# Altium PCB PCB.PcbDoc
Units mil, origin at the board's own origin, x right, y up, seen from the top; angles counter-clockwise.
Board outline 7235 x 2980 mil, 2 copper layers (Top Layer, Bottom Layer); 72 components, 85 nets, 462 pads, 111 vias.
Unrouted connection lines stored in the file: 162.
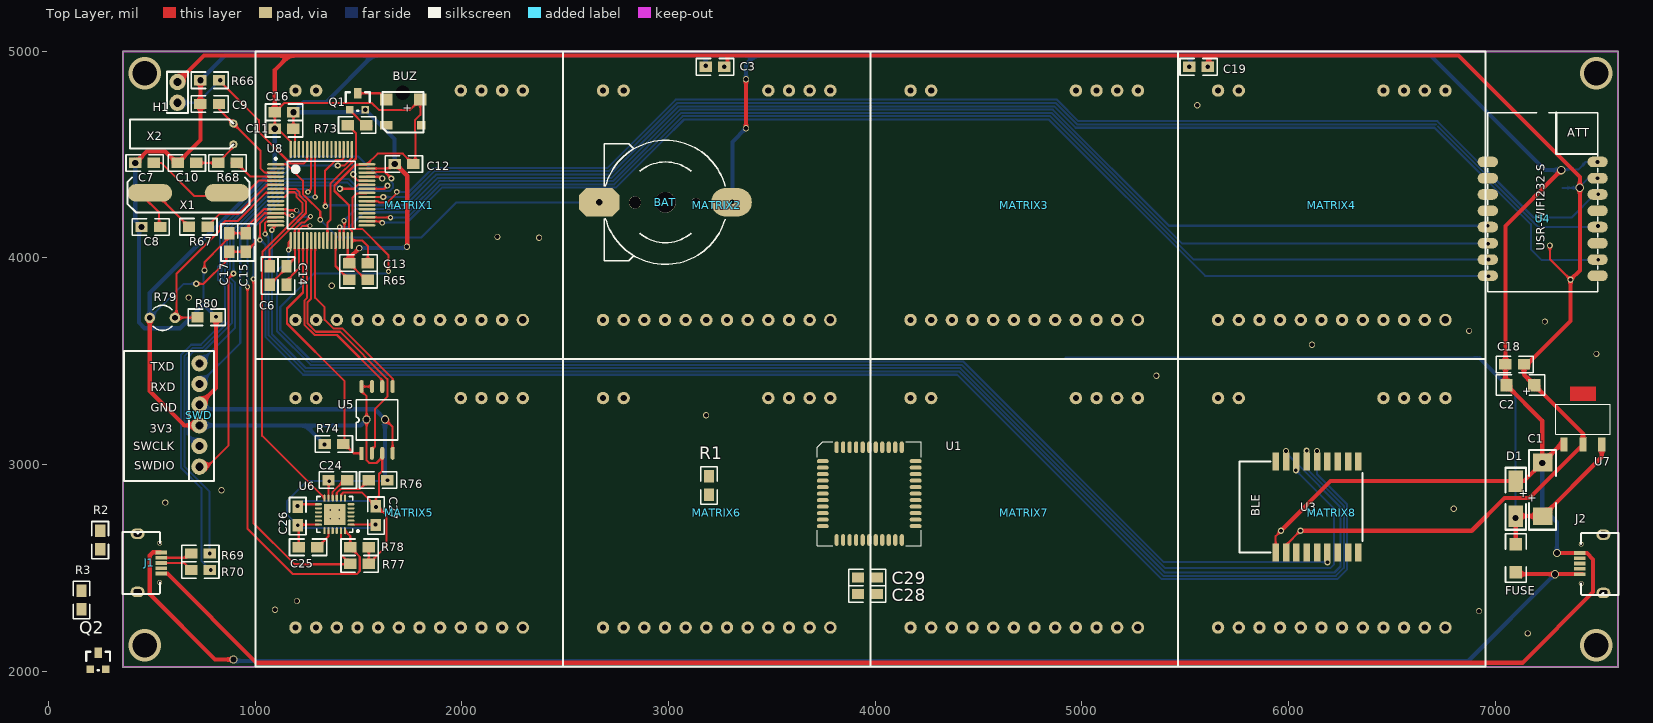
[diagram p0: Top Layer view]
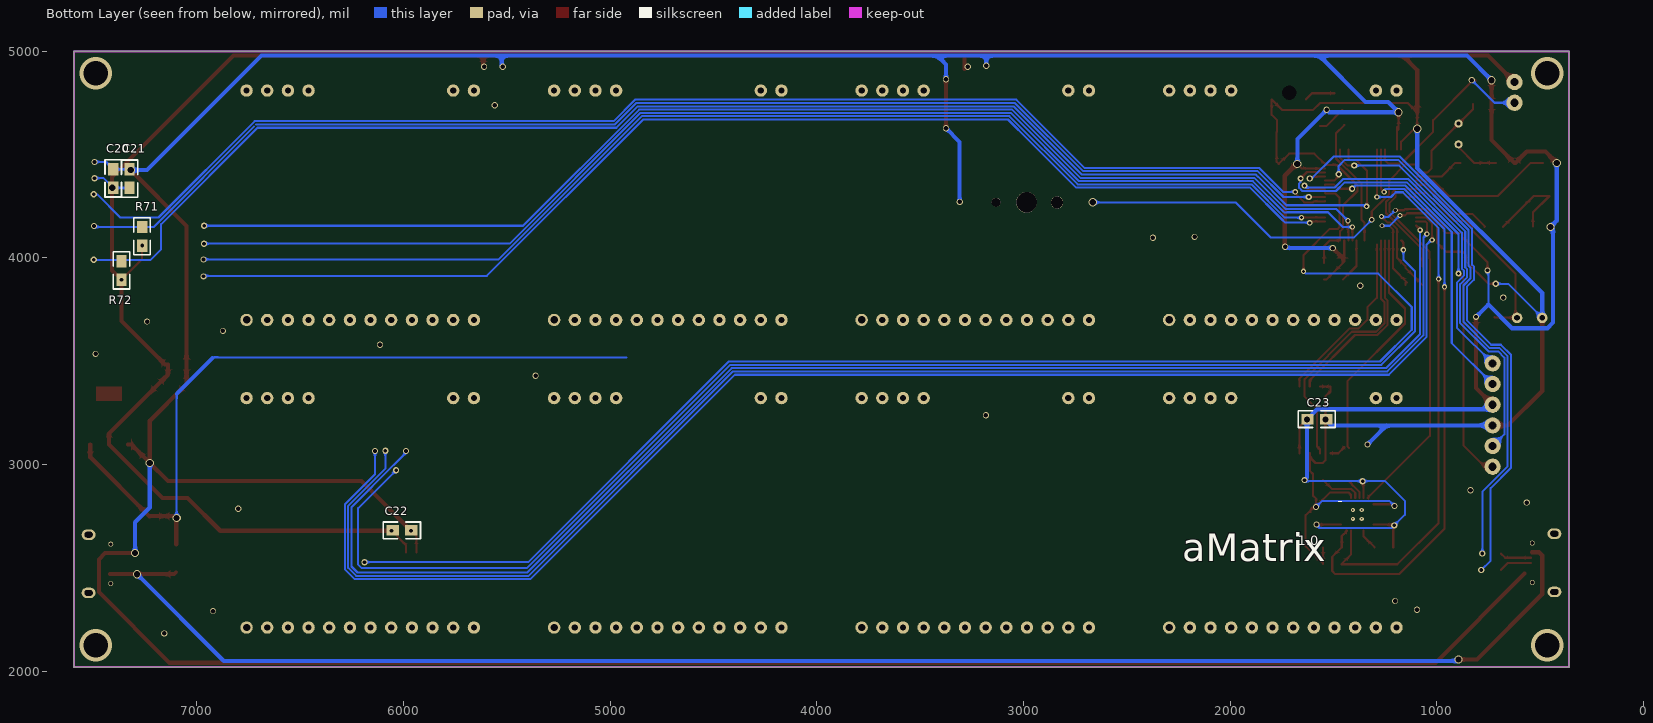
[diagram p1: Bottom Layer view, seen from below]

## Layer stack, top to bottom
Top Solder: solder mask 0.4, Solder Resist, Dk 3.5
Top Layer: signal copper 1.4
Dielectric 1: dielectric 12.6, FR-4, Dk 4.8
Bottom Layer: signal copper 1.4
Bottom Solder: solder mask 0.4, Solder Resist, Dk 3.5

## Board outline
360,2020 360,5000 7595,5000 7595,2020

## Design rules (kind name [scope] priority, off if disabled: settings)
Clearance [All] p1: gap=6
ComponentClearance [All] p1: gap=0 collisioncheckmode=3 verticalgap=0 showdistances=FALSE
HoleSize [All] p1: absolutevalues=TRUE maxlimit=248.03 minlimit=11.81 maxpercent=80.000 minpercent=20.000
PolygonConnect [All] p1: connectstyle=Relief reliefconductorwidth=10 reliefentries=4 polygonreliefangle="90 Angle" airgapwidth=10
RoutingVias [All] p1: holewidth=16 width=30 viastyle="Through Hole" minholewidth=12 minwidth=24 maxholewidth=90 maxwidth=100
SolderMaskExpansion [All] p1: expansion=4
UnpouredPolygon [All] p1: allowunpoured=FALSE
Width [All] p1: maxlimit=30 minlimit=6 preferedwidth=17 minimp=50.000000 maximp=50.000000 favimp=50.000000
27 further rules are at their usual default settings.

## Components (designator, comment, footprint, x,y, rotation, side; value= is the part's Value field where it differs from the comment)
BAT "CR1220" CR1220 2665,4269 r270 top
BUZ "BEEP" BEEP 1814,4607 r180 top
C1 "Cap Pol1" 7343 7230,2750 r90 top
C2 "Cap Pol1" 1206_Diode 7190,3385 r180 top
C3 "Cap" 0805 3270,4925 r180 top
C6 "104" 0805 1070,3870 r90 top
C7 "Cap" 0805 510,4460 r180 top
C8 "Cap" 0805 540,4150 r180 top
C9 "Cap" 0805 825,4745 r180 top
C10 "Cap" 0805 715,4460 r180 top
C11 "Cap" 0805 1185,4625 r180 top
C12 "Cap" 0805 1675,4455 r0 top
C13 "Cap" 0805 1455,3975 r0 top
C14 "Cap" 0805 1152,3960 r270 top
C15 "Cap" 0805 955,4120 r270 top
C16 "Cap" 0805 1185,4705 r180 top
C17 "Cap" 0805 875,4120 r270 top
C18 "Cap" 0805 7140,3485 r180 top
C19 "Cap" 0805 5610,4925 r180 top
C20 "Cap" 0805 7405,4430 r270 bottom
C21 "Cap" 0805 7326,4429 r270 bottom
C22 "Cap" 0805 5963,2682 r0 bottom
C23 "Cap" 0805 1626,3220 r180 bottom
C24 "Cap" 0805 1445,2925 r180 top
C25 "Cap" 0805 1301,2600 r180 top
C26 "Cap" 0805 1206,2796 r270 top
C27 "Cap" 0805 1584,2798 r270 top
C28 "Cap" 0805 3917,2374 r0 top
C29 "Cap" 0805 3917,2454 r0 top
D1 "M7" DO-214AC 7100,2920 r270 top
FUSE "1A 1206" 1206 7100,2480 r90 top
H1 "Header2" Header2 624,4851 r270 top
J1 "MicroUSB" MICROUSB 555,2575 r270 top
J2 "MicroUSB" MICROUSB 7400,2470 r90 top
MATRIX1 "LED_Matrix" LED_Matrix 2295,3700 r0 top locked
MATRIX2 "LED_Matrix" LED_Matrix 3783.19,3700 r0 top locked
MATRIX3 "LED_Matrix" LED_Matrix 5271.38,3700 r0 top locked
MATRIX4 "LED_Matrix" LED_Matrix 6759.57,3700 r0 top locked
MATRIX5 "LED_Matrix" LED_Matrix 2295,2211.81 r0 top locked
MATRIX6 "LED_Matrix" LED_Matrix 3783.19,2211.81 r0 top locked
MATRIX7 "LED_Matrix" LED_Matrix 5271.38,2211.81 r0 top locked
MATRIX8 "LED_Matrix" LED_Matrix 6759.57,2211.81 r0 top locked
Q1 "9014" SOT-23-BJT 1496,4757 r0 top
Q2 "8550" SOT-23-BJT 240,2050 r0 top
R1 "" 0805 3196,2944 r270 top
R2 "" 0805 250,2680 r270 top
R3 "" 0805 160,2300 r90 top
R65 "Res2" 0805 1455,3895 r0 top
R66 "" 0805 825,4860 r180 top
R67 "Res2" 0805 770,4151 r180 top
R68 "Res2" 0805 911,4460 r180 top
R69 "Res2" 0805 690,2570 r0 top
R70 "Res2" 0805 690,2490 r0 top
R71 "Res2" 0805 7265,4150 r270 bottom
R72 "Res2" 0805 7365,3985 r270 bottom
R73 "Res2" 0805 1448,4643 r0 top
R74 "Res2" 0805 1426,3100 r180 top
R76 "Res2" 0805 1550,2925 r0 top
R77 "Res2" 0805 1550,2520 r180 top
R78 "Res2" 0805 1550,2600 r180 top
R79 "Photoresistor" R38 551,3710 r90 top
R80 "Res2" 0805 721,3713 r0 top
SWD "SWD" HEADER6 730,2990 r90 top
U1 "STC15F2K60S2_QFP44" LQFP44 3747,3017 r0 top
U3 "RF-BM-S02" RF-BM-S02 6358,2575 r180 top
U4 "USR-WIFI232-S" USR-WIFI232-S 7496,4703 r0 top
U5 "W25Q128FVSG" W25_Flash 1515,3055 r90 top
U6 "MPU6050" MPU6050 1385,2759 r180 top
U7 "AMS1117 3.3V" SOT-223 7425,3220 r0 top
U8 "STM32F103RET6" STM-LQFP64_M 1320,4305 r0 top
X1 "8M" XTAL_8M 490,4315 r0 top
X2 "32K" XTAL_32K 895,4650 r270 top

## Footprints (in the part's own frame and the unit in brackets; to place one, negate y for a bottom-side part, rotate by r counter-clockwise, add the part's x,y. Pads: shape width x height; smd on the part's side, far side on the other; paste and mask are expansions set on the pad)
0805 [mil]
  rect 60x50 smd: 1(0,0) 2(90,0)
  silkscreen extent -45,-40 135,40
1206 [mil]
  rect 60x60 smd: 1(0,0) 2(135,0)
  silkscreen extent -50,-50 185,50
1206_Diode [mil]
  rect 60x60 smd: 1(0,0) 2(135,0)
  silkscreen extent -50,-50 185,50
7343 [mm]
  rect 2.16x2.41 smd: 1(0,0) 2(6.61,0)
  silkscreen extent -1.65,-1.65 8.13,1.65
BEEP [mil]
  rect 60x60 smd: 1(15,-160) 2(180,-160)
  rect 60x40 smd: 3(180,-35)
  rect 40x40 smd: 4(10,-35)
  round 40 hole 70: 5(99,-192)
  silkscreen extent 0,-197 197,0
CR1220 [mm]
  round 1.1 hole 1.1: 0(-0.01,11.88)
  round 2.54 hole 2.54: 0(-0.01,8.13)
  round 1.5 hole 1.5: 0(0.015,4.38)
  oct 3.5x5 smd: 1(-0.01,0.002)
  oval 3.5x5 smd: 2(-0.01,16.258)
  silkscreen extent -7.63,0.63 7.61,15.49
DO-214AC [mm]
  rect 2.65x1.75 smd: 1(4.3,0) 3(0,0)
  silkscreen extent -1.65,-1.27 5.97,1.27
Header2 [mm]
  round 2 hole 1: 1(0,0) 2(2.54,0)
  silkscreen extent -1.27,-1.27 3.81,1.27
HEADER6 [mm]
  round 2 hole 1: 1(0,0) 2(2.54,0) 3(5.08,0) 4(7.62,0) 5(10.16,0) 6(12.7,0)
  silkscreen extent -1.78,-1.78 14.22,9.27
LED_Matrix [mil]
  round 60 hole 30: 0(-1100,1110.24) 0(-1000,1110.24) 1(0,1110.24) 2(-100,1110.24) 3(-200,1110.24) 4(-300,1110.24) 5(-300,0) 6(-200,0) 7(-100,0) 9(-1100,0) 10(-1000,0) 11(-900,0) 12(-800,0) 13(-700,0) 14(-600,0) 15(-500,0) 16(-400,0)
  round 60 hole 36: 8(0,0)
  silkscreen extent -1294,-189 194,1299
LQFP44 [mm]
  oval 1.45x0.5 smd: 1(0,0) 2(0,-0.8) 3(0,-1.6) 4(0,-2.4) 5(0,-3.2) 6(0,-4) 7(0,-4.8) 8(0,-5.6) 9(0,-6.4) 10(0,-7.2) 11(0,-8) 23(11.4,-8) 24(11.4,-7.2) 25(11.4,-6.4) 26(11.4,-5.6) 27(11.4,-4.8) 28(11.4,-4) 29(11.4,-3.2) 30(11.4,-2.4) 31(11.4,-1.6) 32(11.4,-0.8) 33(11.4,0)
  oval 0.5x1.45 smd: 12(1.7,-9.7) 13(2.5,-9.7) 14(3.3,-9.7) 15(4.1,-9.7) 16(4.9,-9.7) 17(5.7,-9.7) 18(6.5,-9.7) 19(7.3,-9.7) 20(8.1,-9.7) 21(8.9,-9.7) 22(9.7,-9.7) 34(9.7,1.7) 35(8.9,1.7) 36(8.1,1.7) 37(7.3,1.7) 38(6.5,1.7) 39(5.7,1.7) 40(4.9,1.7) 41(4.1,1.7) 42(3.3,1.7) 43(2.5,1.7) 44(1.7,1.7)
  silkscreen extent -0.67,-10.37 12.08,2.38
MICROUSB [mm]
  rect 0.457x1.397 smd: 1(2.6,-0.254) 2(1.95,-0.254) 3(1.3,-0.254) 4(0.65,-0.254) 5(0,-0.254)
  round 0.6 hole 0.45: 5_2(-1.155,-0.42) 6(3.695,-0.42)
  oval 1.3x1.7 hole 0.7 slot 1 at 90 deg: 7(-2.305,-3.15) 8(4.845,-3.15)
  silkscreen extent -2.54,-5.03 5.13,-0.42
MPU6050 [mm] "QFN, 24-Leads, Body 4.00x4.00mm, Pitch 0.50mm, Thermal Pad 2.60x2.60mm, IPC Medium Density"
  oval 0.85x0.26 smd: 1(-2,1.25) 2(-2,0.75) 3(-2,0.25) 4(-2,-0.25) 5(-2,-0.75) 6(-2,-1.25) 13(2,-1.25) 14(2,-0.75) 15(2,-0.25) 16(2,0.25) 17(2,0.75) 18(2,1.25)
  oval 0.26x0.85 smd: 7(-1.25,-2) 8(-0.75,-2) 9(-0.25,-2) 10(0.25,-2) 11(0.75,-2) 12(1.25,-2) 19(1.25,2) 20(0.75,2) 21(0.25,2) 22(-0.25,2) 23(-0.75,2) 24(-1.25,2)
  rect 2.6x2.6 smd: 25(0,0)
  silkscreen extent -2.98,-2.2 2.2,2.2, body extent -2.05,-2.05 2.05,2.05, height 0.95
R38 [mm] "Crystal, Thru-Hole; 2 Leads; Body 3.1 x 8.2 mm (Dia.xH)"
  round 1.3 hole 0.7: 1(0,1.55) 2(0,-1.55)
  silkscreen extent -1.55,-1.19 1.55,1.17
RF-BM-S02 [mm]
  rect 0.8x2.2 smd: 1(10.66,0.024) 2(9.39,0.024) 3(8.12,0.024) 4(6.85,0.024) 5(5.58,0.024) 6(4.31,0.024) 7(3.04,0.024) 8(1.77,0.024) 9(0.5,0.024) 10(0.5,-11.176) 11(1.77,-11.176) 12(3.04,-11.176) 13(4.31,-11.176) 14(5.58,-11.176) 15(6.85,-11.176) 16(8.12,-11.176) 17(9.39,-11.176) 18(10.66,-11.176)
  silkscreen extent 0,-11.2 15.1,0
SOT-23-BJT [mil]
  rect 36x36 smd: 1(-37.5,-40) 2(37.5,-40)
  rect 36x50 smd: 3(0.5,40)
  silkscreen extent -58,-45 58,45
SOT-223 [mil]
  rect 35x69.5 smd: 1(-91,-122.75) 2(0,-122.75) 3(91,-122.75)
  Top Layer region: 62,88 62,157.5 -62,157.5 -62,88
  silkscreen extent -132,-73 132,73
STM-LQFP64_M [mm] "Thin QFP, 64-Leads, Body 10x10mm, Pitch 0.5mm, IPC Low Density"
  oval 2.1x0.3 smd: 1(-5.6,3.75) 2(-5.6,3.25) 3(-5.6,2.75) 4(-5.6,2.25) 5(-5.6,1.75) 6(-5.6,1.25) 7(-5.6,0.75) 8(-5.6,0.25) 9(-5.6,-0.25) 10(-5.6,-0.75) 11(-5.6,-1.25) 12(-5.6,-1.75) 13(-5.6,-2.25) 14(-5.6,-2.75) 15(-5.6,-3.25) 16(-5.6,-3.75) 33(5.6,-3.75) 34(5.6,-3.25) 35(5.6,-2.75) 36(5.6,-2.25) 37(5.6,-1.75) 38(5.6,-1.25) 39(5.6,-0.75) 40(5.6,-0.25) 41(5.6,0.25) 42(5.6,0.75) 43(5.6,1.25) 44(5.6,1.75) 45(5.6,2.25) 46(5.6,2.75) 47(5.6,3.25) 48(5.6,3.75)
  oval 0.3x2.1 smd: 17(-3.75,-5.6) 18(-3.25,-5.6) 19(-2.75,-5.6) 20(-2.25,-5.6) 21(-1.75,-5.6) 22(-1.25,-5.6) 23(-0.75,-5.6) 24(-0.25,-5.6) 25(0.25,-5.6) 26(0.75,-5.6) 27(1.25,-5.6) 28(1.75,-5.6) 29(2.25,-5.6) 30(2.75,-5.6) 31(3.25,-5.6) 32(3.75,-5.6) 49(3.75,5.6) 50(3.25,5.6) 51(2.75,5.6) 52(2.25,5.6) 53(1.75,5.6) 54(1.25,5.6) 55(0.75,5.6) 56(0.25,5.6) 57(-0.25,5.6) 58(-0.75,5.6) 59(-1.25,5.6) 60(-1.75,5.6) 61(-2.25,5.6) 62(-2.75,5.6) 63(-3.25,5.6) 64(-3.75,5.6)
  silkscreen extent -5.72,-4.15 4.15,4.57, body extent -5,-5 5,5, height 1.6
USR-WIFI232-S [mm]
  oval 2.5x1.3 smd: 1(-13.5,-6.051) 2(-13.5,-8.051) 3(-13.5,-10.051) 4(-13.5,-12.051) 5(-13.5,-14.051) 6(-13.5,-16.051) 7(-13.5,-18.051) 8(-13.5,-20.051) 9(0,-20.051) 10(0,-18.051) 11(0,-16.051) 12(0,-14.051) 13(0,-12.051) 14(0,-10.051) 15(0,-8.051) 16(0,-6.051)
  silkscreen extent -13.5,-22 0,0
W25_Flash [mm]
  rect 1.6x0.5 smd: 1(0,0)
  oval 1.6x0.5 smd: 2(0,-1.27) 3(0,-2.54) 4(0,-3.81) 5(8.2,-3.81) 6(8.2,-2.54) 7(8.2,-1.27) 8(8.2,0)
  silkscreen extent 1.63,-4.44 6.56,0.64
XTAL_8M [mm]
  rrect100% 5.5x2.178 smd: 1(0,0) 2(9.5,0)
  silkscreen extent -2.75,-2.41 12.25,1.91
XTAL_32K [mm]
  round 1 hole 0.5: 1(0,0) 2(2.54,0)
  silkscreen extent -0.51,-12.7 3.05,0

## Part data
BAT: library part Battery, "Multicell Battery"
C1 C2: "Polarized Capacitor (Radial)"
C3 C7 C8 C9 C10 C11 C12 C13 C14 C15 C16 C17 C18 C19 C20 C21 C22 C23 C24 C25 C26 C27 C28 C29: "Capacitor"
C6: library part Cap, "Capacitor"
D1: library part Diode, "Default Diode"
FUSE: library part "Fuse 1", "Fuse"
J1 J2: "Imported"
Q1: library part 2N3904, "NPN General Purpose Amplifier"
Q2: library part 2N3906, "PNP General Purpose Amplifier"
R1 R2 R3 R66: library part Res2, "Resistor"
R65 R67 R68 R69 R70 R71 R72 R73 R74 R76 R77 R78 R80: "Resistor"
U5: library part W25Q128
U7: library part AMS1117
U8: "ARM Cortex-M3 32-bit MCU, 512 KB Flash, 64 KB Internal RAM, 51 I/Os, 64-pin LQFP, -40 to 85 degC, Tray"
X1 X2: library part XTAL, "Crystal Oscillator"

## Via types
v1: diameter 30, hole 18, Top Layer to Bottom Layer, 32 vias
v2: diameter 30, hole 22, Top Layer to Bottom Layer, 29 vias
v3: diameter 40, hole 30, Top Layer to Bottom Layer, 16 vias
v4: diameter 26, hole 15, Top Layer to Bottom Layer, 16 vias
v5: diameter 30, hole 16, Top Layer to Bottom Layer, 6 vias
v6: diameter 157.48, hole 118.11, Top Layer to Bottom Layer, 4 vias
v7: diameter 19.68, hole 7.87, Top Layer to Bottom Layer, 4 vias
v8: diameter 24, hole 15, Top Layer to Bottom Layer, 4 vias

## Nets (pads, with @x,y where several pads share a name; then routed paths per layer and width w, separated by ;. In a path a pad name is that pad's centre, name@x,y a point inside that pad or via, vN(x,y) a via of type N, cw(c..) or ccw(c..) an arc to the next point about the centre after c; other vN are vias at no path point)
ADC123_IN10: R79.2 R80.1 U8.8 | length 972.7
  Top Layer w10: R79.2 620,3717.98 620,3925 830,4135 830,4153 856,4179 915,4179 1050.84,4314.84 U8.8 ; R79.2@619.02,3711 719,3711 R80.1
BLE_EN: U3.6 U8.41 | length 6769.5
  Top Layer w10: U8.41 1538.63,4313 1493,4313 1470,4290 1470,4150 1479.54,4140.46 1518.54,4140.46 1645,4014 v4(1645,3935)
  Bottom Layer w10: v4(1645,3935) 1634.08,3924.08 1494.08,3924.08 1282.92,3924.08 1121.5,3762.66 1121.5,3652.34 1274.84,3499 1770.91,3499 4425.88,3499 5396.88,2528 v1(6189,2528)
BOOT0: H1.2 R66.1 U8.60 | length 958.1
  Top Layer w10: R66.1@812,4853.56 812,4860 R66.1 1018,4667 1018,4610 1171,4457 1236,4457 1251.1,4472.1 U8.60
  Bottom Layer w10: H1.2 721,4751 v2(831,4861)
BOOT1: R65.1 U8.28 | length 216.9
  Top Layer w10: U8.28 1388.9,3961.1 R65.1
D+: R70.2 U8.45 | length 2879.7
  Top Layer w10: U8.45 1606.42,4393.58 v1(1615,4385)
  Bottom Layer w10: v1(785,2490) 740,2535 740,2886.14 641,2985.14 641,3531.25 689.75,3580 736.75,3580 855,3698.25 855,3860.35 821,3894.35 821,3959 830.51,3968.51 830.51,4141.84 1179.67,4491 1499,4491 1600,4390
D-: R69.2 U8.44 | length 2646.2
  Top Layer w10: v1@1475,4395 1496.1,4373.9 U8.44
  Bottom Layer w10: v1(780,2570) 780,2868.77 657,2991.77 657,3524.63 696.37,3564 743.37,3564 871,3691.63 871,3866.98 837,3900.98 837,3952.37 846.51,3961.88 846.51,4135.21 1186.29,4475 1445,4475 1475,4445 v1(1475,4405)
DU: J1.3 R2.2 R70.1 | length 159
  Top Layer w10: J1.3 656.18,2523.82 R70.1
GND: BAT.2 C1.2 C2.2 C3.2 C6.1 C7.2 C8.2 C9.2 C10.2 C11.1 C12.1 C13.1 C14.1 C15.1 C16.1 C17.1 C18.2 C19.2 C20.1 C21.1 C22.1 C23.1 C24.2 C25.2 C26.2 C27.2 C28.2 C29.2 D1.3 J1.1 J2.1 Q1.2 R65.2 R66.2 R76.2 R80.2 SWD.4 U1.16 U3.1 U4.16 U5.4 U6.1 U6.11 U6.18 U7.1 U8.12 U8.18 U8.31 U8.47 U8.63 | length 28231.1
  Top Layer w10: C10.2@620,4460 C10.2 ; v1(755,3940) 755,3980 839,4064 839,4064.56 845.44,4071 846,4071 875,4100 C17.1 C15.1 968,4133 968,4161.63 1042.47,4236.1 U8.12 1153.9,4236.1 1159,4231 v8(1201,4231) ; C6.1 1152,3952 C14.1 1192.05,4000.05 U8.18 1192.05,4139.68 1223.37,4171 1238,4171 v8(1267,4200) ; v3(1185,4705) C11.1 1185,4622.05 C11.1@1192.05,4615 ; U8.63 C11.1@1192.05,4615 ; C11.1@1192.05,4632.95 C11.1@1192.05,4615 ; C26.2@1209.79,2709.79 U6.18 ; C25.2 C26.2@1211,2708.58 ; U6.11 1355.47,2916.47 v1(1359,2920) ; U8.31 1447.95,3982.05 C13.1 ; C13.1@1455,3999 C13.1 ; U6.1 v1(1582.21,2709.79) ; U8.47 1652.95,4432.95 C12.1@1660,4440 ; R65.2 1535,3895 C13.1 ; v3(1628,3219) 1665,3182 U5.4 ; U3.1 5938.31,2654.31 v1(5964,2680)
  Top Layer w15: C2.2@7050,3390 C2.2 ; v3(7228,3008) 7228,3008.24 C1.2
  Top Layer w20: v3(420,4460) 475,4515 565,4515 C10.2@620,4460 ; 575,2472.64 1006.64,2041 7132,2041 7474.54,2383.54 7474.54,2541.36 7444.13,2571.77 7433.23,2571.77 7432.64,2572.36 J2.1 v3(7299,2572.36) ; C10.2 735,4570 C9.2 v3(735,4860) ; SWD.4 811,3371 R80.2 ; C13.1@1455,3999 v2(1504,4048) ; v3(1675,4455) 1678.84,4455 1736,4397.84 1736,4056 v2(1734,4054) ; v2@3374,4862 3375,4861 v2(3375,4628) ; v1(5964,2680) 6204,2920 D1.3 7139.76,2920 7228,3008.24 7228,3212 C2.2 ; C2.2@7050,3390 C18.2 7050,4155 v3(7320,4425) ; C1.2 7317.01,3097.25 U7.1
  Bottom Layer w10: v3@438,4138 v3(450,4150) ; 750,3775 v1@751,3932.23 ; v8(1201,4231) 1202,4231 1235,4198 1265,4198 v8(1267,4200) ; 1521.5,4705 v2(1533.5,4717) ; v1(1582.21,2709.79) 1565.42,2693 1219,2693 v1(1206,2706) 1155,2757 1155,2825 1250,2920 v1(1359,2920) 1635,2920 v1(1640,2925) ; C21.1 7404,4429 C20.1 7439.78,4464.78 v1(7496,4464.78)
  Bottom Layer w20: v3(420,4460) 420,4180 v3(450,4150) ; v3@438,4138 438,3687 465,3660 637,3660 751,3774 v1(810,3715) ; SWD.4 752,3268 1579,3268 v3(1628,3219) 1628,2937 v1(1640,2925) ; v3(735,4860) 854,4979 1569,4979 ; v2(1504,4048) 1728,4048 v2(1734,4054) v2@1735,4055 ; 1521.5,4705 v3(1185,4705) 1235,4755 1345,4755 1569,4979 ; v2(1533.5,4717) 1675,4575.5 v3(1675,4455) ; v2(3180,4930) 3180,4979 ; v2(3309,4271) 3309,4562 v2(3375,4628) ; v2(3375,4865) 3375,4936 3418,4979 ; v2(5520,4925) 5525,4930 5525,4979 ; v3(7228,3008) 7228,2792 7299,2721 v3(7299,2572.36) ; v3(7320,4425) 7242,4425 6688,4979 5525,4979 ; 1569,4979 3180,4979 ; 3180,4979 3418,4979 ; 3418,4979 5525,4979
  other v2: 7158,2183 6922,2291 1096,2298 1202,2340 6800,2786 565,2816 837,2876 3182,3239 5361,3430 7490,3536 6114,3580 6874,3647 7241,3692 679,3808 1371,3866 2374,4098 2172,4102 5559,4739
H1: MATRIX1.9 MATRIX2.9 MATRIX3.1 MATRIX7.1 U1.40
H2: MATRIX1.10 MATRIX2.10 MATRIX3.2 MATRIX7.2 U1.41
H3: MATRIX1.11 MATRIX2.11 MATRIX3.3 MATRIX7.3 U1.42
H4: MATRIX1.12 MATRIX2.12 MATRIX3.4 MATRIX7.4 U1.43
H5: MATRIX1.13 MATRIX2.13 MATRIX3.5 MATRIX7.5 U1.44
H6: MATRIX1.14 MATRIX2.14 MATRIX3.6 MATRIX7.6 U1.1
H7: MATRIX1.15 MATRIX2.15 MATRIX3.7 MATRIX7.7 U1.2
H8: MATRIX1.16 MATRIX2.16 MATRIX3.8 MATRIX7.8 U1.3
H9: MATRIX4.1 MATRIX5.9 MATRIX6.9 MATRIX8.1 U1.4
H10: MATRIX4.2 MATRIX5.10 MATRIX6.10 MATRIX8.2 U1.5
H11: MATRIX4.3 MATRIX5.11 MATRIX6.11 MATRIX8.3 U1.7
H12: MATRIX4.4 MATRIX5.12 MATRIX6.12 MATRIX8.4 U1.8
H13: MATRIX4.5 MATRIX5.13 MATRIX6.13 MATRIX8.5 U1.9
H14: MATRIX4.6 MATRIX5.14 MATRIX6.14 MATRIX8.6 U1.10
H15: MATRIX4.7 MATRIX5.15 MATRIX6.15 MATRIX8.7 U1.11
H16: MATRIX4.8 MATRIX5.16 MATRIX6.16 MATRIX8.8 U1.12
I2C1_SCL: R77.2 U6.23 U8.58 | length 2772.8
  Top Layer w10: v4(991,3898) 992,3897 992,2717 1191,2518 1462,2518 R77.2 1414.53,2565.47 U6.23 ; v4@1290.47,4295 U8.58
  Bottom Layer w10: v4(991,3898) 991,4143.94 1165.06,4318 1199,4318 1222,4295 v4(1290,4295)
I2C1_SDA: R78.2 U6.24 U8.59 | length 2911.9
  Top Layer w10: v4(963,3860) 963,2690 1183,2470 1491,2470 1506,2485 1506,2554 R78.2 1460,2654.47 U6.24 ; v4(1255,4319) 1270.79,4334.79 U8.59
  Bottom Layer w10: v4(963,3860) 963,4138.57 1158.43,4334 1250,4334 1255,4329 v4(1255,4319)
L1: MATRIX1.1 MATRIX3.9 MATRIX4.9 MATRIX5.1 U1.30
L2: MATRIX1.2 MATRIX3.10 MATRIX4.10 MATRIX5.2 U1.31
L3: MATRIX1.3 MATRIX3.11 MATRIX4.11 MATRIX5.3 U1.32
L4: MATRIX1.4 MATRIX3.12 MATRIX4.12 MATRIX5.4 U1.33
L5: MATRIX1.5 MATRIX3.13 MATRIX4.13 MATRIX5.5 U1.34
L6: MATRIX1.6 MATRIX3.14 MATRIX4.14 MATRIX5.6 U1.35
L7: MATRIX1.7 MATRIX3.15 MATRIX4.15 MATRIX5.7 U1.36
L8: MATRIX1.8 MATRIX3.16 MATRIX4.16 MATRIX5.8 U1.37
L9: MATRIX2.1 MATRIX6.1 MATRIX7.9 MATRIX8.9 U1.17
L10: MATRIX2.2 MATRIX6.2 MATRIX7.10 MATRIX8.10 U1.26
L11: MATRIX2.3 MATRIX6.3 MATRIX7.11 MATRIX8.11 U1.27
L12: MATRIX2.4 MATRIX6.4 MATRIX7.12 MATRIX8.12 U1.28
L13: MATRIX2.5 MATRIX6.5 MATRIX7.13 MATRIX8.13 U1.29
L14: MATRIX2.6 MATRIX6.6 MATRIX7.14 MATRIX8.14 U1.38
L15: MATRIX2.7 MATRIX6.7 MATRIX7.15 MATRIX8.15 U1.39
L16: MATRIX2.8 MATRIX6.8 MATRIX7.16 MATRIX8.16 U1.6
MPU6050_INT: U6.12 U8.9 | length 1803.5
  Top Layer w10: U8.9 1142.22,4295.16 1165.06,4318 1191,4318 1199,4310 1199,4295.8 1230,4264.8 1230,4224.13 1160.8,4154.94 1035,4029.14 1035,3996.56 1034,3995.56 1034,3139.53 U6.12
NetBAT_1: BAT.1 U8.1 | length 1843.4
  Top Layer w10: U8.1 1152.36,4452.64 1231,4374 1231,4309.06 1245.06,4295 1245.25,4295 1315,4225.25 v4(1315,4185)
  Bottom Layer w10: v4(1315,4185) 1400,4100 1805,4100 1974.38,4269.38 v3(2665.06,4269.38)
NetBUZ_2: BUZ.2 Q1.3 | length 149.9
  Top Layer w10: Q1.3 1604,4797 BUZ.2
NetC6_2: C6.2 U8.7 | length 565.4
  Top Layer w10: C6.2 1070,4041.51 1165.36,4136.87 1246,4217.51 1246,4271.63 1238.63,4279 1238.43,4279 1215,4302.43 1215,4316.63 1197.1,4334.53 U8.7
NetC8_1: C8.1 R67.2 X1.1 | length 467.9
  Top Layer w10: C8.1@535,4152 535,4220 455,4300 531,4300 R67.2
NetC10_1: C10.1 R68.2 X2.2 | length 229
  Top Layer w10: C10.1 820,4460 890,4530 X2.2@890,4555
NetC24_1: C24.1 U6.10 | length 137.7
  Top Layer w10: U6.10 1375.16,2868.16 1427,2920 C24.1@1461,2920
NetC25_1: C25.1 U6.20 | length 102.8
  Top Layer w10: C25.1 1355.47,2654.47 U6.20
NetJ1_4: J1.4 R69.1 | length 153.5
  Top Layer w10: J1.4 669.41,2549.41 R69.1
NetQ1_1: Q1.1 R73.2 | length 139.7
  Top Layer w10: Q1.1 1457.75,4716.25 1536,4638 R73.2@1564,4638
NetQ2_1: Q2.1 R3.1
NetQ2_3: Q2.3 R2.1
NetR76_1: R76.1 U6.9 | length 206.5
  Top Layer w10: U6.9 1394.84,2863.66 1412.65,2881.47 1506.47,2881.47 R76.1
OSC32IN: C9.1 U8.3 X2.1 | length 476.4
  Top Layer w10: C9.1 825,4720 X2.1 1025,4520 1025,4435 1046.73,4413.27 U8.3
OSC32OUT: R68.1 U8.4 | length 242
  Top Layer w10: R68.1@885,4460 R68.1 977.42,4393.58 U8.4
OSCIN: C7.1 U8.5 X1.2 | length 709.4
  Top Layer w10: C7.1@487,4460 C7.1 545,4460 705,4300 942,4300 1015.9,4373.9 U8.5
OSCOUT: R67.1 U8.6 | length 417.7
  Top Layer w10: R67.1 768,4153 827,4212 917,4212 1059.21,4354.21 U8.6
RX: SWD.5 U8.43 | length 1572.4
  Top Layer w10: v5(1410,4335) 1477,4335 1497,4355 1539.68,4355 U8.43
  Bottom Layer w10: SWD.5 927.72,3587.72 927.72,4125.91 1151.8,4350 1395,4350 v5(1410,4335) ; v5(1410,4335) 1410,4345 1420,4335 v5(1410,4335)
SPI1_MISO: U5.2 U8.22 | length 1296
  Top Layer w10: U8.22 1270.79,3803.79 1254,3787 1254,3683.02 1294.02,3643 1411,3643 1640,3414 1640,3329 1579,3268 1579,3087 1565,3073 U5.2
SPI1_MOSI: U5.5 U8.23 | length 867.7
  Top Layer w10: U8.23@1290,4065 1290,3807 1336,3761 1336,3701.02 1378.02,3659 1421,3659 1665,3415 U5.5
SPI1_NSS: R74.1 U5.1 U8.20 | length 1234.9
  Top Layer w10: U8.20 1231.42,3832.69 1154,3755.27 1154,3683.02 1433,3404.02 1433,3089 R74.1@1424,3080 ; R74.1@1448,3084 1477,3055 U5.1
SPI1_SCK: U5.6 U8.21 | length 931.9
  Top Layer w10: U8.21 1251.1,3806.73 1238,3793.63 1238,3676.39 1287.39,3627 1396,3627 1615,3408 U5.6
SWCLK: SWD.2 U8.49 | length 1990.4
  Top Layer w10: v5(1400,4447) 1431,4447 1467.64,4483.64 U8.49
  Bottom Layer w10: SWD.2 673,3147 673,3518 703,3548 750,3548 887,3685 887,3873.6 853,3907.6 853,3945.75 862.51,3955.25 862.51,4128.58 1180.92,4447 v5(1400,4447)
SWDIO: SWD.1 U8.46 | length 2296.7
  Top Layer w10: SWD.1 768,2990 870,3092 870,3900 v5(895,3925) ; U8.46 1582.27,4413.27 1585,4416 1628,4416 v5(1659,4385)
  Bottom Layer w10: v5(895,3925) 895,4115.82 1145.18,4366 1445.77,4366 1487.77,4324 1650.77,4324 1666,4339.23 1666,4360.77 1660.38,4366.38 v5@1660.38,4386.38
TIM3_CH3: R73.1 U8.26 | length 633.7
  Top Layer w10: U8.26 1350.16,4085.16 1350.16,4170 1364,4183.84 1364,4359.55 1435.45,4431 1437.63,4431 1488,4481.37 1488,4603 R73.1
TX: SWD.6 U8.42 | length 1718.3
  Top Layer w10: U8.42 1624.53,4334.53 v5(1640,4350)
  Bottom Layer w10: SWD.6 903,3663 903,3880.23 869,3914.23 869,3935.77 869.63,3936.4 869.63,3939.74 878.51,3948.62 878.51,4121.96 1138.55,4382 1453,4382 1495,4340 1630,4340 v5(1640,4350)
USART2_CTS: U3.14 U8.14 | length 7017.3
  Top Layer w10: v4(1023,4087) 1023,4165.63 1054.1,4196.73 U8.14
  Bottom Layer w10: v4@1028,4086 1049,4065 1049,3618.75 1232.75,3435 4397,3435 5386,2446 6236.25,2446 6284,2493.75 6284,2807.02 6138,2953.02 v1(6138,3066)
USART2_RTS: U3.15 U8.15 | length 6947.6
  Top Layer w10: v4(1048,4116) 1048,4133.71 1047.19,4134.52 1047.19,4167.19 1057.05,4177.05 U8.15
  Bottom Layer w10: v4(1048,4116) 1065,4099 1065,3625.37 1239.37,3451 4406,3451 5395,2462 6229.63,2462 6268,2500.37 6268,2800.4 6088,2980.4 v1(6088,3067)
USART2_RX: U3.16 U8.17 | length 6596.3
  Top Layer w10: v4(1162,4039) 1162,4074.17 U8.17
  Bottom Layer w10: v4(1162,4039) 1162,3992.4 1105.5,3935.9 1105.5,3645.71 1268.21,3483 1777.54,3483 4419.25,3483 5403.25,2499 6203,2499 6220,2516 6220,2789 v1(6036,2973)
USART2_TX: U3.17 U8.16 | length 6862.3
  Top Layer w10: v4(1081,4135) 1081,4138.83 U8.16
  Bottom Layer w10: v4@1075,4132 1081,4126 1081,3632 1246,3467 1784.17,3467 4412.63,3467 5401.63,2478 6223,2478 6252,2507 6252,2793.77 6046.77,2999 6046,2999 5988,3057 v1(5988,3066)
USART3_CTS: U4.8 U8.34 | length 5954.9
  Top Layer w10: U8.34 1612.95,4177.05 1615,4175 v4(1615,4170)
  Bottom Layer w10: v4(1615,4170) 1616,4171 1734.37,4171 1751.75,4188.37 1903.37,4340 2745,4340 2969.42,4564.42 3075,4670 4233.23,4670 4840,4670 5596.5,3913.5 6965.5,3913.5 v1(6968,3911)
USART3_RTS: U4.7 U8.35 | length 5918.7
  Top Layer w10: U8.35 1653.27,4196.73 v4(1655,4195)
  Bottom Layer w10: v4(1655,4195) 1735.75,4195 1896.74,4356 2738.37,4356 3068.37,4686 4846.63,4686 5539.63,3993 v1(6968,3993)
USART3_RX: U4.5 U8.30 | length 6089
  Top Layer w10: U8.30 1428.27,4135.74 1432.58,4140.06 1432.58,4177.42 v4(1430,4180)
  Bottom Layer w10: v4(1430,4180) 1487.12,4237.12 1731.74,4237.12 1734.63,4240 1735.49,4240 1883.49,4388 2725.12,4388 3055.12,4718 4859.88,4718 5421.88,4156 v1(6965,4156)
USART3_TX: U4.6 U8.29 | length 6115.4
  Top Layer w10: U8.29 v4(1408.58,4150)
  Bottom Layer w10: v4(1408.58,4150) 1455.25,4150 1526.37,4221.12 1725.11,4221.12 1727.18,4219.04 1736.3,4219.04 1741.26,4224 1742.12,4224 1890.12,4372 2731.75,4372 3061.75,4702 4853.25,4702 5486.25,4069 v1(6966,4069)
USART5_RX: R1.1 U1.19 U8.54
USART5_TX: U1.18 U8.53
USBM: R3.2 U8.10
VCC3: BUZ.1 C2.1 C3.1 C11.2 C12.2 C13.2 C14.2 C15.2 C16.2 C17.2 C18.1 C19.1 C20.2 C21.2 C22.2 C23.2 C26.1 C27.1 H1.1 Q2.2 R71.2 R72.2 R74.2 R77.1 R78.1 R79.1 SWD.3 U3.2 U4.15 U5.3 U5.7 U5.8 U6.8 U6.13 U7.2 U8.13 U8.19 U8.32 U8.48 U8.64 | length 19514
  Top Layer w10: v1(715,3875) 750,3875 860,3985 860,4015 C17.2 C15.2 999,4074 999,4170 1045.42,4216.42 U8.13 1143.58,4216.42 1154,4206 v8(1178,4206) ; v3(1095,4625) C16.2 1140,4750 1565,4750 1600,4715 1747,4715 BUZ.1 1799,4692.56 1773,4666.56 1773,4611 1775,4609 1775,4465 C12.2 1715,4505 1592.83,4505 U8.48 1537.69,4449.86 1483.09,4449.86 1384,4350.77 1384,4324.23 1454,4254.23 1454,4143.37 1467.64,4129.73 U8.32 1518.47,4084.53 1545,4058 C13.2 ; C11.2@1100,4635 1172.36,4562.64 U8.64 ; C14.2 1152,3881 1143.56,3881 1211.73,3949.18 U8.19 1211.73,4136.73 1230,4155 1265,4155 v8(1266,4156) ; C26.1 1206,2808.21 U6.13 ; U6.8 1414.53,2852.46 1427.54,2865.47 1516.53,2865.47 C27.1 ; R78.1 R77.1 1635,2605 1635,2755 1592,2798 C27.1 ; U5.7 U5.8 1515,3354 1539,3330 v3(1539,3218) 1539,3021 1552,3008 1587,3008 U5.3@1615,3036 ; U5.3 U5.3@1615,3036 ; U3.2 5988.31,2610.31 v1(6058,2680) ; v1(7265,4060) 7265,3995 v1(7365,3895) ; C27.1 1584,2835 1599,2850 1599,2954.56 1615,2970.56 U5.3@1615,3036
  Top Layer w20: R79.1 489.98,3357.02 657,3190 SWD.3 ; H1.1 752,4979 1165,4979 ; C16.2 1095,4909 1165,4979 ; C3.1@3285,4915 3285,4979 ; v2(5610,4925) 5615,4930 5615,4979 ; v1(6058,2680) 6887,2680 7046,2839 7166.75,2839 U7.2 7425,3150 C2.1 7140,3435 C18.1 7155,3485 7365,3695 v1(7365,3895) 7410,3940 v3(7410,4340) 7410,4391 6822,4979 5615,4979 ; 1165,4979 3285,4979 ; 3285,4979 5615,4979
  Bottom Layer w10: R79.1 654.98,3875 v1(715,3875) ; v8(1178,4206) 1228,4156 v8(1266,4156) ; v1(1205,2800) 1230,2825 1555,2825 v1(1585,2795) ; C21.2 7404,4339 C20.2 7451.04,4386.04 v1(7496,4386.04)
  Bottom Layer w20: R79.1 489.98,3831.01 1095,4436.03 v3(1095,4625) ; SWD.3 1243,3190 ; v1(1336,3097) 1243,3190 ; v3(1539,3218) 1511,3190 1243,3190
  other v2: 3270,4925
VCC5: C1.1 C28.1 C29.1 D1.1 FUSE.2 R1.2 U1.14 U7.3 | length 3840.7
  Top Layer w15: C1.1@7229.29,2750.71 C1.1
  Top Layer w20: FUSE.2 D1.1 C1.1@7229.29,2750.71 ; C1.1 7516,3036 U7.3
  Bottom Layer w10: 4921,3519 6918,3519 6928,3519 7098,3349 7098,3339 v3(7098,2742)
  Bottom Layer w15: 6918,3519 7098,3339
VIN: FUSE.1 J1.5 J2.5 | length 7675.5
  Top Layer w15: FUSE.1 FUSE.1@7110,2470
  Top Layer w20: J1.5@540,2576 506,2576 490,2560 490,2373 806,2057 v3(895,2057) ; FUSE.1@7110,2470 v3(7290,2470) J2.5 J2.5@7420,2470
  Bottom Layer w20: v3(895,2057) 902,2050 6870,2050 v3(7290,2470)
WIFI_RELOAD: R71.1 U4.12 U8.40 | length 6402.9
  Top Layer w10: U8.40 v5@1621.47,4295.16 ; v5(1620,4295) 1621.32,4295 v5@1621.47,4295.16 ; v5@1626.32,4300 v5@1621.47,4295.16 ; v5@1631.16,4295.16 v5@1621.47,4295.16
  Bottom Layer w10: v5(1620,4295) 1742,4295 1867,4420 2711.86,4420 3041.86,4750 4873.14,4750 4977.14,4646 6713.37,4646 ; 6722.75,4636.63 7209.37,4150 R71.1 7332.63,4150 7493,4150 v1(7498,4155)
WIFI_RESET: R72.1 U4.10 U8.51 | length 7069.1
  Top Layer w10: v4(1340,4250) 1338,4252 1338,4421.77 1389.36,4473.13 1418.13,4473.13 1428.27,4483.27 U8.51
  Bottom Layer w10: v4(1340,4250) 1345,4255 1727,4255 1730.07,4258.07 1865,4393 1865.86,4393 1876.86,4404 2718.49,4404 3048.49,4734 4866.51,4734 4970.51,4630 6706.75,4630 7172.75,4164 7172.75,4042.25 7224,3991 v1(7499,3991)
WIFI_WPS: U4.14 U8.39 | length 6465.1
  Top Layer w10: U8.39 1541.94,4274 1595,4274 1600,4269 1641.77,4269 1692.77,4320 v4(1685,4320)
  Bottom Layer w10: v4(1685,4320) 1744.37,4320 1860.37,4436 2705.24,4436 3035.24,4766 4879.76,4766 4983.76,4662 6720,4662 7186,4196 7371,4196 7483,4308 v1(7499,4308)
pads on no net: BAT.0 BUZ.3 BUZ.4 BUZ.5 J1.2 J1.5_2 J1.6 J1.7 J1.8 J2.2 J2.3 J2.4 J2.5_2 J2.6 J2.7 J2.8 MATRIX1.0 MATRIX2.0 MATRIX3.0 MATRIX4.0 MATRIX5.0 MATRIX6.0 MATRIX7.0 MATRIX8.0 U1.13 U1.15 U1.20 U1.21 U1.22 U1.23 U1.24 U1.25 U3.3 U3.4 U3.5 U3.7 U3.8 U3.9 U3.10 U3.11 U3.12 U3.13 U3.18 U4.1 U4.2 U4.3 U4.4 U4.9 U4.11 U4.13 U6.2 U6.3 U6.4 U6.5 U6.6 U6.7 U6.14 U6.15 U6.16 U6.17 U6.19 U6.21 U6.22 U6.25 U8.2 U8.11 U8.24 U8.25 U8.27 U8.33 U8.36 U8.37 U8.38 U8.50 U8.52 U8.55 U8.56 U8.57 U8.61 U8.62
copper on no net:
  other v6: 466.3,2126.3 7488.7,2126.3 466.3,4893.7 7488.7,4893.7
  other v7: 1363.35,2737.35 1406.65,2737.35 1363.35,2780.65 1406.65,2780.65

## Polygon pours and split planes (outlines as drawn)
GND on Top Layer "Bottom Layer-No Net" (solid, remove dead copper, shelved, pour order 10): 7595,2020 360,2020 360,5000 7595,5000
GND on Bottom Layer "Bottom Layer-No Net" (solid, remove dead copper, shelved, pour order 12): 7595,2020 360,2020 360,5000 7595,5000

## Keep-outs
Keep-Out Layer:
  the board outline again, w10

## Other copper
Top Layer:
  pour cut-out: 5700,2550 5900,2550 5900,3050 5700,3050
  pour cut-out: 6900,4500 7550,4500 7550,4750 6900,4750
Bottom Layer:
  pour cut-out: 5700,2550 5900,2550 5900,3050 5700,3050
  pour cut-out: 6900,4500 7550,4500 7550,4750 6900,4750

## Silkscreen, mask and mechanical layers (free items; w line width, h text height)
Bottom Overlay:
  lines w2: 1460,2820 1476,2820
  text "1.0" at 1673,2594 h80
  text "aMatrix" at 2231,2487 h230
Mechanical 13:
  lines w10: 360,2020 1000,2020 6955,2020 7595,2020 7595,5000 6955,5000 1000,5000 360,5000 360,2020

## Text inside footprints (layer, text, board x,y; h text height)
BUZ: Top Overlay "+" at 1759,4742 h40 r180
C1: Top Overlay "+" at 7155,2820 h40
C2: Top Overlay "+" at 7170,3330 h40 r90
D1: Top Overlay "+" at 7160,2875 h40 r180
SWD: Top Overlay "TXD" at 495,3455 h40; Top Overlay "RXD" at 495,3355 h40; Top Overlay "3V3" at 490,3155 h40; Top Overlay "SWCLK" at 410,3070 h40; Top Overlay "GND" at 495,3255 h40; Top Overlay "SWDIO" at 415,2975 h40
U3: Top Overlay "BLE" at 5860,2750 h40 r90
U4: Top Overlay "ATT" at 7350,4586 h40